# Altium PCB LKS_EVB_MVPOW_V4.0.PcbDoc (part 2 of 2)
Units mil, origin at the board's own origin, x right, y up, seen from the top; angles counter-clockwise.
Board outline 11300 x 7874.02 mil, 2 copper layers (Top Layer, Bottom Layer); 132 components, 86 nets, 363 pads, 334 vias.
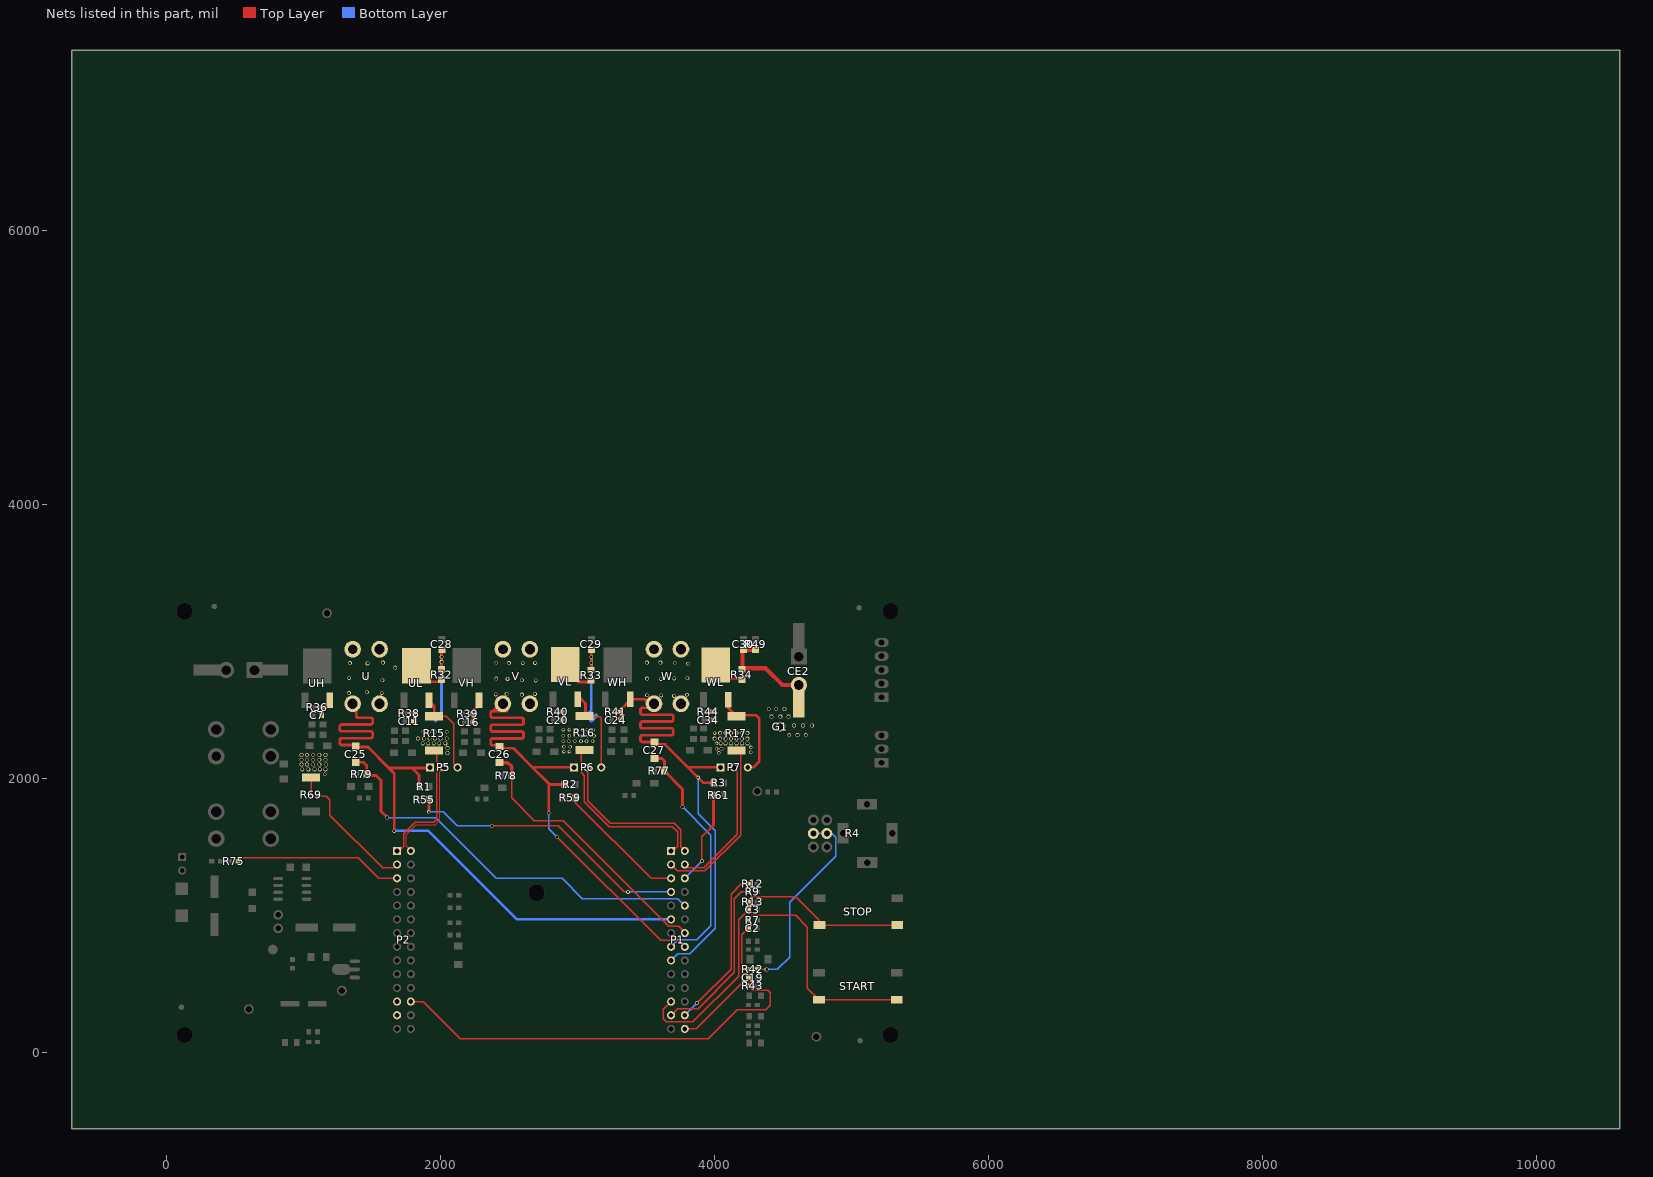
[diagram p2: the nets of this part, all layers, seen from the top]

## Via types
v1: diameter 26, hole 16, Top Layer to Bottom Layer, 92 vias
v2: diameter 28, hole 20, Top Layer to Bottom Layer, 77 vias
v3: diameter 27.99, hole 20, Top Layer to Bottom Layer, 73 vias
v4: diameter 28, hole 18, Top Layer to Bottom Layer, 52 vias
v5: diameter 26, hole 18, Top Layer to Bottom Layer, 40 vias

## Nets (pads, with @x,y where several pads share a name; then routed paths per layer and width w, separated by ;. In a path a pad name is that pad's centre, name@x,y a point inside that pad or via, vN(x,y) a via of type N, cw(c..) or ccw(c..) an arc to the next point about the centre after c; other vN are vias at no path point) (continued)
PGND: C28.1 C29.1 C30.1 CE2.2 G1.1 P1.1 P1.2 P2.1 P2.2 R15.2 R16.1 R17.2 R32.1 R33.1 R34.1 R49.2 R69.1 | length 6424.9
  Top Layer w10: R69.1@1054.41,2011.11 1054.41,1884.12 1063.52,1875 1165,1875 1192.23,1847.77 1192.23,1736.05 1577.35,1350.93 1661.45,1350.93 ; P2.1@1692.44,1471.01 1730.95,1509.52 1730.95,1600.95 1815,1685 1951.14,1685 1973.13,1706.99 1973.13,2186.86 R15.2@1952.5,2207.49 ; R16.1@3025,2185.72 3025,2050 3050,2025 3050,1834.72 3231.91,1652.81 3691.43,1652.81 3729.82,1614.43 3729.82,1508.37 3696.64,1475.19 P1.1@3682.39,1475.19 ; P1.2@3682.39,1375.19 3727.5,1330.08 3930.08,1330.08 4190,1590 4190,2176.64
  Top Layer w20: R32.1@2007.13,2802.08 C28.1@2007.13,2941.01 ; R33.1@3098.9,2793.46 C29.1@3098.9,2931.12
  Top Layer w30: C30.1@4203.69,2942.41 4203.69,2808.13 4372.16,2808.13 4494.17,2686.11 CE2.2@4615.51,2686.11 ; C30.1@4203.9,2942.2 R49.2@4303.03,2942.2
  Bottom Layer w20: 1962.9,2423.19 2007.13,2467.42 v4@2007.13,2889.83 ; 3067.14,2467.7 3098.95,2499.51 v5(3098.95,2893.01)
  Bottom Layer w30: 3099.84,2428.47 3133.42,2462.05
  other v1: 4030,2190 4265,2195 2900,2200 2940,2200 4015,2220 4265,2230 2900,2235 2945,2235 4015,2260 2895,2275 2935,2275 2980,2275 3025,2275 3065,2275 3110,2275 2895,2315 2940,2315 2990,2315 3035,2315 3075,2315 3120,2315 4000,2335 2895,2360 2940,2360 2995,2360 3035,2360 3070,2360 3115,2360
  other v3: 1155,2035 990,2070 1035,2070 1080,2070 1119.95,2070.18 1160,2070 985,2105 1025,2105 1070,2105 1115,2105 1165,2105 985,2140 1025,2140 1070,2140 1115,2140 1160,2140 985,2175 1025,2175 1070,2175 1115,2175 1160,2175 2050,2190 4050,2220 2050,2225 1870,2260 1910,2260 1950,2260 1990,2260 2035,2260 4045,2260 4080,2260 4120,2260 4160,2260 4200,2260 4240,2260 1835,2295 1880,2295 1920,2295 1960,2295 2000,2295 2045,2295 4545,2320 4605,2320 4665,2320 1875,2345 1915,2345 1955,2345 2000,2345 2045,2345 4580,2390 4645,2390 4710,2390 4415,2455 4480,2455 4540,2455 4395,2510 4450,2510 4510,2510
  other v4: 4000,2295 4040,2295 4080,2295 4120,2295 4160,2295 4200,2295 4240,2295 4040,2335 4080,2335 4120,2335 4160,2335 4200,2335 4240,2335 2007.13,2853.62 2007.13,2892.65
  other v5: 3098.96,2849.89
PU: P1.4 R55.1 | length 2100.3
  Top Layer w10: v2(2373.54,1656.85) 2859.88,1656.86 3341.17,1175.58 v4(3368.14,1175.58)
  Top Layer w20: v1(1915,1760) 1915,1847 R55.1@1918,1850
  Bottom Layer w10: v1(1915,1760) 2020.17,1760 2123.31,1656.85 v2(2373.54,1656.85) ; v4(3368.14,1175.58) P1.4@3682,1175.58
PV: P1.3 R59.1 | length 961
  Top Layer w10: R59.1@2984.51,1862 2984.51,1827.73 3537.04,1275.19 P1.3@3682.39,1275.19
PW: P1.17 R61.1 | length 694.2
  Top Layer w10: v2@3907.42,1400.22 3907.42,1577.42 3964.33,1634.33
  Top Layer w20: 3964.33,1634.33 3992.14,1662.14 R61.1@3992.14,1882.01
  Bottom Layer w10: P1.17@3782.39,1275.19 v2(3907.79,1400.58)
RXD0: P1.13 R9.1 | length 1252.7
  Top Layer w10: P1.13@3682.39,275.19 3731.72,324.52 3879.87,324.52 4145,589.65 4145,1126.55 4193.45,1175 R9.1@4247.85,1175
RXD1: P2.12
SPIN: C19.2 P2.26 R42.2 R43.2 | length 3227.8
  Top Layer w10: P2.26@1782.39,375.19 1872.44,375.19 2142.63,105 3955.26,105 4165.26,315 4372.15,315 4406.98,349.83 4406.98,440 4388.98,458 4280,458 R43.2@4248,490 C19.2@4248,550 R42.2@4248,610
START1: C2.2 P1.28 R7.2 START.2 START.4 | length 2649.6
  Top Layer w10: P1.28@3782.39,175.19 3865.19,175.19 4198.91,508.91 4198.91,863.91 4251.13,916.13 4251.13,980.13 4276,1005 4590.88,1005 4677.8,918.08 4677.8,474.05 START.2@4762.71,389.13 START.4@5327.66,389.13
STOP1: C3.1 P1.12 R13.1 STOP.2 STOP.4 | length 2626.4
  Top Layer w10: P1.12@3682.39,375.19 3624.64,317.44 3624.64,248.96 3647.58,226.02 3842.36,226.02 4177.08,560.75 4177.08,974.08 C3.1@4248,1045 4248,1118 4270,1140 4591.01,1140 4760,971.01 STOP.2@4760,940 ; STOP.2@4766.4,933.98 STOP.4@5333.33,933.98
TXD0: P1.27 R12.2 | length 1183.6
  Top Layer w10: v2(3871.48,364.27) 4120,612.78 4120,1160 4195,1235 4218.3,1235 R12.2@4247.85,1235
  Bottom Layer w10: P1.27@3782.39,275.19 v2(3871.48,364.27)
TXD1: P2.13
UI: C11.2 P5.3 R15.1 R38.1 UL.3 | length 661.8
  Top Layer w10: R15.1@1952.89,2457.26 2041.03,2457.26 2095.4,2402.89 2095.4,2109.42 P5.3@2124.05,2080.77
  Top Layer w20: UL.3@1907.37,2590.59 1907.37,2578.05 1952.89,2532.53 R15.1@1952.89,2446.69
UP-: P2.15 P5.2 | length 815.1
  Top Layer w8: P2.15@1782.39,1475.19 1750,1507.58 1750,1591.35 1823.65,1665 1960,1665 1995,1700 1995,2051.72 P5.2@2025.97,2082.69
UX: C7.2 C25.2 P1.6 P5.1 R1.2 R32.2 R36.1 U.1 UH.3 UL.2 | length 5074.2
  Top Layer w10: P1.6@3690.36,972.72 P1.6@3690.36,987.92
  Top Layer w20: C7.2@1132,2465 1133.5,2466.5 1133.5,2523.5 R36.1@1132,2525 ; R36.1@1144.12,2526.82 UH.3@1191.15,2573.85 ; U.1@1364.45,2508.84 1384.24,2489.06 1384.24,2462.5 ccw(c1399.24,2462.5) 1399.24,2447.5 1489.24,2447.5 cw(c1489.24,2432.5) 1504.24,2432.5 1504.24,2412.5 cw(c1489.24,2412.5) 1489.24,2397.5 1279.24,2397.5 ccw(c1279.24,2382.5) 1264.24,2382.5 1264.24,2362.5 ccw(c1279.24,2362.5) 1279.24,2347.5 1489.24,2347.5 cw(c1489.24,2332.5) 1504.24,2332.5 1504.24,2312.5 cw(c1489.24,2312.5) 1489.24,2297.5 1279.24,2297.5 ccw(c1279.24,2282.5) 1264.24,2282.5 1264.24,2262.5 ccw(c1279.24,2262.5) 1279.24,2247.5 1369.24,2247.5 cw(c1369.24,2232.5) C25.2@1384.23,2232.69 ; v2(1661.99,1621.11) 1661.98,2040.42 1621.64,2080.77 ; R1.2@1842,1945 1842,2028.77 1790,2080.77 ; UL.2@1850.76,2777.29 1850.76,2759.79 1900.34,2710.21 R32.2@1998.04,2710.21 ; P5.1@1924.05,2080.77 1790,2080.77 ; C25.2@1384.24,2232.5 ccw(c1369.24,2232.5) C25.2@1384.23,2232.69 ; C25.2@1384.24,2232.5 1384.24,2222.5 C25.2@1380.93,2239.36 1377.55,2232.69 C25.2@1384.23,2232.69 ; C25.2@1384.24,2232.5 1469.9,2232.5 1621.64,2080.77 ; 1621.64,2080.77 1790,2080.77
  Bottom Layer w20: v2@1661.86,1621.12 1910.73,1621.12 2556.66,975.19 P1.6@3682.39,975.19
  other v4: 1331.37,2627.07 1570.03,2628.61 1462.25,2633.23 1575.42,2721 1463.79,2734.08 1333.68,2737.93 1668.57,2812.61 1467.64,2843.41 1338.3,2845.71 1578.5,2849.56
VB1: C27.1 P1.8 R77.1 | length 1790.5
  Top Layer w20: C27.1@3560.39,2149.61 3615.39,2149.61 3635,2130 3635,2062 R77.1@3633,2060 3633,2057.41 3765.57,1924.84 v2(3765.57,1797.49)
  Bottom Layer w10: P1.8@3682.39,775.19 3732.68,825.49 3870.49,825.49 3973.66,928.66 3973.66,1589.38 v2@3758.73,1804.31
VB2: C26.1 P1.21 R78.1 | length 1996.4
  Top Layer w10: R78.1@2518,2025 2518,1861.52 2685,1694.52 2894.95,1694.52 3663.7,925.77 3738.69,925.77 P1.21@3780.13,884.34
  Top Layer w25: C26.1@2430.39,2119.61 2490.39,2119.61 2518,2092 R78.1@2518,2025
VB3: C25.1 P1.19 R79.1 | length 3006.6
  Top Layer w20: C25.1@1382.5,2119.68 C25.1@1380.93,2121.25 1438.75,2121.25 1461,2099 R79.1@1461,2035 1471,2025 1530,2025 1565,1990 1565,1764.44 v2(1611.31,1718.13)
  Bottom Layer w10: v2(1611.31,1718.13) 1963.42,1718.13 2406.55,1275 2887.19,1275 3035,1127.19 3730.39,1127.19 P1.19@3782.39,1075.19
VI: C20.2 P6.3 R16.2 R40.1 VL.3 | length 647.3
  Top Layer w10: R16.2@3068.99,2452.72 3162.2,2452.72 3172.56,2442.37 3172.56,2084.83 P6.3@3172.79,2084.61
  Top Layer w20: VL.3@2998.46,2592.01 3018.21,2592.01 3058.57,2551.65 R16.2@3058.57,2446.89
VOL_ADC: P2.3 R75.2 | length 1236.6
  Top Layer w10: R75.2@518.5,1399.16 544.34,1425 1400,1425 1549.81,1275.19 P2.3@1682.39,1275.19
VP-: P1.15 P6.2 | length 1175.7
  Top Layer w10: P6.2@3072.79,2084.61 3072.79,1842.21 3240,1675 3705,1675 3751.39,1628.61 3751.39,1506.19 P1.15@3782.39,1475.19
VS1: C24.2 C27.2 P1.9 P7.1 R3.2 R34.2 R41.1 W.1 WH.3 WL.2 | length 4339.2
  Top Layer w20: C24.2@3312,2425 3312,2485 3312,2504.54 WH.3@3384.43,2576.98 ; WH.3@3384.02,2581.28 3490.17,2581.28 W.1@3547.95,2523.5 ; C27.2@3567.19,2253.02 3637.85,2253.02 3806.27,2084.61 ; C27.2@3571.42,2269.54 3474.18,2269.54 cw(c3474.18,2284.54) 3459.18,2284.54 3459.18,2304.54 cw(c3474.18,2304.54) 3474.18,2319.54 3684.18,2319.54 ccw(c3684.18,2334.54) 3699.18,2334.54 3699.18,2354.54 ccw(c3684.18,2354.54) 3684.18,2369.54 3474.18,2369.54 cw(c3474.18,2384.54) 3459.18,2384.54 3459.18,2404.54 cw(c3474.18,2404.54) 3474.18,2419.54 3684.18,2419.54 ccw(c3684.18,2434.54) 3699.18,2434.54 3699.18,2454.54 ccw(c3684.18,2454.54) 3684.18,2469.54 3474.18,2469.54 cw(c3474.18,2484.54) 3459.18,2484.54 3459.18,2504.54 cw(c3474.18,2504.54) 3474.18,2519.54 3547.95,2519.54 3570.72,2519.54 ccw(c3570.72,2528.01) W.1@3579.18,2528.01 ; R3.2@3992.14,1972.01 3918.87,1972.01 v1(3880,2010.87) 3806.27,2084.61 ; WL.2@4009.18,2830.64 4107.96,2731.86 R34.2@4204.79,2731.86 ; P7.1@4042.39,2084.61 3806.27,2084.61
  Bottom Layer w10: P1.9@3682.39,675.19 3729.67,722.48 3817.48,722.48 4005.15,910.15 4005.15,1620.8 3880,1745.94 v1(3880,2010.87)
  other v4: 3704.5,2606.18 3611.3,2609.64 3507.75,2611.36 3798.8,2615.18 3607.85,2730.44 3507.75,2732.17 3706.23,2733.9 3801.15,2735.62 3806.32,2840.9 3709.68,2847.8 3506.03,2849.53 3604.4,2849.53
VS2: C16.2 C26.2 P1.22 P6.1 R2.2 R33.2 R39.1 V.1 VH.3 VL.2 | length 4362.5
  Top Layer w10: v2(2851.66,1575.73) 3605.42,821.97 3735.61,821.97 P1.22@3782.39,775.19
  Top Layer w20: R39.1@2232,2475 2236,2471 2236,2416 C16.2@2237,2415 ; R39.1@2235,2475 2241,2481 2241,2499 2266.15,2524.15 2266.15,2561.24 VH.3@2280.75,2575.85 ; 2396.86,2515.18 2416.11,2495.93 ; C26.2@2432.41,2230.24 2416.72,2245.93 2381.1,2245.93 cw(c2381.1,2260.93) 2366.1,2260.93 2366.1,2280.93 cw(c2381.1,2280.93) 2381.1,2295.93 2591.1,2295.93 ccw(c2591.1,2310.93) 2606.1,2310.93 2606.1,2330.93 ccw(c2591.1,2330.93) 2591.1,2345.93 2381.1,2345.93 cw(c2381.1,2360.93) 2366.1,2360.93 2366.1,2380.93 cw(c2381.1,2380.93) 2381.1,2395.93 2591.1,2395.93 ccw(c2591.1,2410.93) 2606.1,2410.93 2606.1,2430.93 ccw(c2591.1,2430.93) 2591.1,2445.93 2381.1,2445.93 cw(c2381.1,2460.93) 2366.1,2460.93 2366.1,2480.93 cw(c2381.1,2480.93) 2381.1,2495.93 2416.11,2495.93 ; C26.2@2447.1,2224.46 2530.9,2224.46 2670.75,2084.61 ; V.1@2486.1,2502.19 cw(c2479.84,2502.19) 2479.84,2495.93 2416.11,2495.93 ; v1(2790,1750) 2790,1965.36 ; R2.2@2907,1960 2795.36,1960 2790,1965.36 ; VL.2@2958.19,2755.46 3005.84,2707.81 R33.2@3098.92,2707.81 ; P6.1@2972.79,2084.61 2670.75,2084.61 ; 2670.75,2084.61 2790,1965.36
  Top Layer w30: VL.2@2911.27,2835.1 VL.2@2983.4,2907.22
  Bottom Layer w10: v1(2790,1750) 2790,1637.39 v2(2851.66,1575.73)
  other v4: 2593.18,2616.27 2402.91,2617.09 2688.5,2620.52 2481.98,2622.03 2694.49,2719.23 2594,2720.88 2488.57,2730.76 2406.2,2732.41 2499.28,2846.08 2599.77,2846.9 2690.37,2846.9 2406.2,2848.55
WI: C34.2 P7.3 R17.1 R44.1 WL.3 | length 722.6
  Top Layer w20: WL.3@4099.73,2578.67 4099.73,2517.38 R17.1@4159.03,2458.08 ; R17.1@4175.14,2465.89 4301.92,2465.89 4325.99,2441.82 4325.99,2125.99 4284.61,2084.61 P7.3@4242.39,2084.61
WP-: P1.16 P7.2 | length 992
  Top Layer w10: P1.16@3782.39,1375.19 3806.53,1351.05 3920,1351.05 4165,1596.05 4165,2061.99 P7.2@4142.39,2084.61
ZB: R4.3 R4.5 R42.1 | length 1508
  Top Layer w10: R42.1@4312,610 v3(4380,610)
  Bottom Layer w10: v3(4380,610) 4458.36,610 4547.36,699 4547.36,1100.05 4883.06,1435.75 4883.06,1572.91 R4.5@4853.83,1602.13 ; R4.3@4720.74,1602.13 R4.5@4819.17,1602.13 R4.5@4853.83,1602.13 ; R4.5@4819.62,1636.35 R4.5@4853.83,1602.13
pads on no net: R4.0 U4.3 U4.6

## Polygon pours and split planes (outlines as drawn)
PGND on Top Layer "PGND_L01_P082" (solid, pour order 82): 3980,2375 4290,2375 4305,2360 4305,2160 4295,2150 3990,2150 3980,2160
PGND on Top Layer "PGND_L01_P081" (solid, pour order 81): 2870,2380 2870,2150 2880,2140 3135,2140 3155,2160 3155,2380
PGND on Top Layer "PGND_L01_P080" (solid, pour order 80): 1810,2370 2080,2370 2080,2155 2065,2140 1820,2140 1810,2150
GND on Top Layer "Bottom Layer-No Net" (solid, remove dead copper, pour order 79): 215,995 650,995 650,519.65 778.65,519.65 894,635 899,630 1090,630 1090,315 960,185 840,65 510,65 495,65 215,345
PGND on Top Layer "Bottom Layer-No Net" (solid, remove dead copper, pour order 71): 971.78,2204.3 971.78,1940.64 972.27,1940 1188.86,1940 1195,1947.94 1195,2146.52 1195,2164.13 1163.42,2205
+5V on Top Layer "Bottom Layer-No Net" (solid, remove dead copper, pour order 78): 1080,505 1325,505 1325,225 1324.07,226.14 1080,226.14
WI on Top Layer "Top Layer-No Net" (solid, remove dead copper, pour order 59): 3980.28,2597.41 4021.94,2639.07 4243.08,2639.07 4266.24,2639.07 4273.96,2631.35 4281.68,2623.63 4281.68,2504.41 4281.68,2406.68 3979.48,2406.4
VI on Top Layer "Top Layer-No Net" (solid, remove dead copper, pour order 61): 2920.55,2638.24 2923.79,2641.48 3100.63,2641.48 3126.02,2641.48 3130.7,2636.79 3140.47,2627.03 3140.47,2469.61 3140.47,2405 2870,2405 2870,2599.02 2909.22,2638.24
UI on Top Layer "Top Layer-No Net" (solid, remove dead copper, pour order 62): 1827.2,2629.4 1795,2597.2 1795,2400 2040.75,2400 2040.75,2516.3 2040.75,2623.29 2032.89,2631.15
VS1 on Top Layer "Bottom Layer-No Net" (solid, remove dead copper, pour order 72): 3491.16,3026.45 3459.58,2994.88 3459.58,2969.05 3459.58,2687.07 3424.43,2651.91 3392.14,2619.63 3392.14,2588.06 3392.14,2544.29 3397.88,2538.55 3438.06,2498.37 3719.32,2498.37 3809.72,2498.37 3828.38,2517.03 3834.12,2522.77 3834.12,2605.28 3834.12,2647.61 3847.74,2661.23 3857.79,2671.28 3934.56,2671.28 3983.35,2671.28 4012.77,2700.7 4018.51,2706.44 4018.51,2908.78 4018.51,2968.33 4010.62,2976.22 3993.4,2993.44 3819.77,2993.44 3787.48,2993.44 3753.76,3027.16
VS2 on Top Layer "Bottom Layer-No Net" (solid, remove dead copper, pour order 73): 2388.34,3013.8 2356.77,2982.22 2356.77,2956.4 2356.77,2674.42 2321.61,2639.26 2289.32,2606.98 2289.32,2575.41 2289.32,2531.64 2295.06,2525.9 2335.24,2485.72 2616.5,2485.72 2706.9,2485.72 2725.56,2504.37 2731.3,2510.11 2731.3,2592.63 2731.3,2634.96 2744.92,2648.58 2754.97,2658.63 2831.74,2658.63 2880.53,2658.63 2909.96,2688.05 2915.7,2693.79 2915.7,2896.13 2915.7,2955.68 2907.8,2963.57 2890.58,2980.79 2716.95,2980.79 2684.66,2980.79 2650.94,3014.51
UX on Top Layer "Bottom Layer-No Net" (solid, remove dead copper, pour order 74): 1300.75,3012.37 1269.18,2980.8 1269.18,2954.97 1269.18,2673 1234.02,2637.84 1201.73,2605.55 1201.73,2573.98 1201.73,2530.22 1207.47,2524.48 1247.65,2484.3 1528.91,2484.3 1619.31,2484.3 1637.97,2502.95 1643.71,2508.69 1643.71,2591.2 1643.71,2633.54 1657.33,2647.16 1667.38,2657.2 1744.15,2657.2 1792.94,2657.2 1822.37,2686.63 1828.11,2692.37 1828.11,2894.7 1828.11,2954.26 1820.21,2962.15 1802.99,2979.37 1629.36,2979.37 1597.07,2979.37 1563.35,3013.09
GND on Top Layer "Bottom Layer-No Net" (solid, remove dead copper, pour order 75): 1056.69,1742.69 1060.98,1742.69 1114.17,1670.14 1122.75,1658.44 1122.75,1561.33 1122.75,1553.14 1108.16,1533.25 1107.31,1534.42 740.16,1534.42 50.46,1534.42 -42.18,1660.78 22.17,1748.55 22.17,1913.53 22.17,1984.9 31.6,1997.77 39.31,2008.29 790.77,2008.29 823.38,2008.29 840.53,1984.9 865.4,1950.98 865.4,1771.94 865.4,1745.03 864.54,1743.86
GND on Top Layer "Bottom Layer-No Net" (solid, remove dead copper, pour order 69): 275.39,1983.9 225.38,2033.91 225.38,2175.26 225.38,2640.63 298.22,2713.47 450.45,2865.71 450.45,2959.22 450.45,3001.62 415.66,3036.41 401.52,3050.55 221.03,3050.55 126.43,3050.55 51.41,2975.53 18.79,2942.91 18.79,1982.81
+48V on Top Layer "Bottom Layer-No Net" (solid, remove dead copper, pour order 67): 653.01,3316.24 645.27,3316.24 614.27,3285.24 612.72,3283.69 612.72,2948.92 612.72,2807.88 535.22,2730.38 295.74,2490.89 295.74,2411.36 295.74,2157.73 313.59,2139.88 318.24,2135.23 653.01,2135.23 851.4,2135.23 871.55,2155.38 896.35,2180.18 896.35,2218.92 896.35,2673.04 941.29,2717.98 944.4,2714.88 1042.03,2714.88 1161.37,2714.88 1197.03,2750.54 1204.77,2758.28 1204.77,2959.77 1204.77,3035.71 1252.82,3083.76 1511.65,3083.76 1958.01,3083.76 1996.76,3045.01 2102.15,2939.62 2102.15,2869.87 2271.09,2869.87 2274.19,2872.97 2288.14,2886.92 2288.14,2978.36 2288.14,3004.71 2317.59,3034.16 2367.18,3083.76 2517.52,3083.76 3072.38,3083.76 3115.77,3040.36 3194.82,2961.32 3194.82,2891.57 3202.57,2891.57 3225.81,2868.32 3228.91,2865.22 3363.75,2865.22 3380.8,2865.22 3388.55,2872.97 3388.55,2952.02 3388.55,3031.06 3428.85,3071.36 3433.5,3076.01 4079.8,3076.01 4140.24,3076.01 4185.19,3031.06 4186.74,3032.61 4360.33,3032.61 4388.22,3032.61 4413.02,3007.81 4464.17,2956.67 4464.17,2928.77 4464.17,2893.12 4479.67,2877.62 4484.31,2872.98 4783.45,2872.98 4805.15,2872.98 4831.49,2899.32 4831.48,2899.33 4831.48,3268.18 4831.48,3300.75 4750.9,3381.33
PGND on Top Layer "Bottom Layer-No Net" (solid, remove dead copper, pour order 63): 4373.22,2728.34 4719.2,2728.34 4747.71,2699.83 4758.5,2689.04 4758.5,2397 4758.5,2394.69 4588.98,2225.16 4407.12,2225.16 4370.14,2225.16 4370.14,2225.17
GND on Top Layer "Bottom Layer-No Net" (solid, remove dead copper, pour order 49): 851.65,1833.75 854.38,1836.48 1135.34,1836.48 1139.42,1836.48 1147.62,1828.28 1153.55,1822.35 1153.55,1688.95 1153.55,1554.62 1132.16,1533.23 1131.7,1532.76 1106.2,1532.76 881.7,1532.76 855.74,1558.73
GND on Top Layer "Bottom Layer-No Net" (solid, remove dead copper, pour order 50): 805.77,2008.29 805.89,2008.18 871.14,2008.18 895.54,2008.18 901.99,2001.73 920.27,1983.45 920.27,1908.48 920.27,1901.67 974.43,1847.51 1005.63,1816.31 1005.63,1721.63 937.13,1721.63 772.16,1886.6
+15V on Top Layer "Bottom Layer-No Net" (solid, remove dead copper, pour order 53): 675,950 1085,950 1085,754.25 1080,749.42 1080,660 680,660 675,664.83
GND on Top Layer "Bottom Layer-No Net" (solid, remove dead copper, pour order 58): 1090,630 630,630 630,485 640,475 650,465 965,465 965,590 975,600
NetCE3_1 on Top Layer "Bottom Layer-No Net" (solid, remove dead copper, pour order 46): 195,1050 415,1050 445,1050 460,1065 470,1075 470,1205 470,1225 480,1235 505,1260 730,1260 730,1290 695,1325 675,1345 455,1345 355,1345 305,1295 190,1295
NetR37_2 on Top Layer "Bottom Layer-No Net" (solid, remove dead copper, pour order 48): 525,1225 510,1210 510,1195 510,1140 520,1130 535,1115 665,1115 690,1115 730,1155 730,1185 710,1185 670,1225
GND on Top Layer "Bottom Layer-No Net" (solid, remove dead copper, pour order 52): 985,1130 985,1060 985,1035 990,1030 1000,1020 1090,1020 1170,1020 1180,1010 1210,980 1210,910 1210,795 1220,785 1375,785 1375,1090 1335,1130
NetC4_2 on Top Layer "Bottom Layer-No Net" (solid, remove dead copper, pour order 57): 555,1085 860,1085 860,985 850,975 640,975 595,975 570,1000 555,1015 555,1035
GND on Bottom Layer "Bottom Layer-No Net" (solid, remove dead copper, pour order 77): 313.62,633.42 291.92,611.73 291.92,342.04 291.92,338.94 422.11,208.75 654.6,-23.74 2378.07,-23.74 4737.02,-23.74 5313.59,552.83 5335.28,574.53 5335.28,1820.65 5335.28,1902.31 5316.69,1920.91 5308.67,1928.93 4200.04,1928.93 4047.63,1928.93 4018.75,1900.05 4012.34,1893.64 4012.34,1733.2 4012.34,1691.49 3981.85,1661 3895.21,1574.36 2422.39,1574.36 2059.8,1574.36 2005.25,1519.81 1921.83,1436.39 1921.83,1190.92 1921.83,699.47 1856.77,634.4
GND on Bottom Layer "Top Layer-No Net" (solid, remove dead copper, pour order 65): 1116.26,1827.77 1116.26,1894.82 1172.55,1986.64 1213.65,2053.68 1326.24,2053.68 3271.43,2053.68 3316.1,1980.81 3316.1,1740.55 1261.15,1740.55 1196.68,1635.39
PGND on Bottom Layer "Top Layer-No Net" (solid, remove dead copper, pour order 76): 1007.65,1976.98 969.71,2014.92 969.71,2103.9 969.71,2423.65 990.22,2444.16 996.08,2450.02 1144.12,2450.02 1162.65,2450.02 1199.76,2412.92 1207.63,2405.05 1589.8,2405.05 1633.42,2405.05 1727.69,2499.32 1731.98,2503.6 2230.92,2503.6 2231.13,2503.6 2322.28,2412.46 2322.36,2412.37 2586.43,2412.37 2739.21,2412.37 2816.69,2489.85 2835.51,2508.67 3283.7,2508.67 3314.12,2508.67 3383.63,2439.16 3396.65,2426.13 3841.23,2426.13 3846.3,2426.13 3920.88,2500.71 3924.5,2504.33 4236.57,2504.33 4248.88,2504.33 4313.32,2568.77 4358.21,2613.66 4358.21,2691.86 4358.21,2717.93 4368.35,2728.06 4374.14,2733.85 4506.64,2733.85 4754.12,2733.85 4772.22,2715.75 4775.27,2712.7 4775.27,2313.9 4775.27,2208.19 4760.79,2193.71 4746.16,2179.08 4207.37,2179.08 1274.81,2179.08 1233.66,2137.93 1159.31,2063.58 1159.31,1992.53 1159.31,1990.77 1145.52,1976.98
GND on Bottom Layer "Bottom Layer-No Net" (solid, remove dead copper, pour order 68): 277.01,1984.71 226.99,2034.72 226.99,2176.08 226.99,2641.45 299.83,2714.29 452.06,2866.52 452.06,2960.03 452.06,3002.43 417.27,3037.23 403.14,3051.36 222.64,3051.36 128.05,3051.36 53.02,2976.34 20.4,2943.72 20.4,1983.62
GND on Bottom Layer "Bottom Layer-No Net" (solid, remove dead copper, pour order 70): 23.02,2043.25 23.02,1787.19 51.07,1760.87 354.52,1476.1 1216.43,1476.1 1220.26,1476.1 1234.28,1489.26 1233.01,1490.46 1233.01,1610.11 1233.01,1783.6 1255.96,1805.14 1167.98,1887.7 949.96,1887.7 921.91,1887.7 836.48,1967.87 786.75,2014.53 749.78,2014.53
+48V on Bottom Layer "Bottom Layer-No Net" (solid, remove dead copper, pour order 66): 650.43,3314.49 642.69,3314.49 611.69,3283.5 610.14,3281.95 610.14,2947.17 610.14,2806.13 532.64,2728.64 293.16,2489.15 293.16,2409.62 293.16,2155.99 311.01,2138.14 315.66,2133.49 650.43,2133.49 848.82,2133.49 868.97,2153.63 893.77,2178.43 893.77,2217.18 893.77,2671.29 938.71,2716.24 941.82,2713.13 1039.45,2713.13 1158.79,2713.13 1194.45,2748.8 1202.19,2756.54 1202.19,2958.02 1202.19,3033.97 1250.24,3082.01 1509.07,3082.01 1955.43,3082.01 1994.18,3043.26 2099.57,2937.87 2099.57,2868.13 2268.51,2868.13 2271.61,2871.23 2285.56,2885.18 2285.56,2976.62 2285.56,3002.97 2315.01,3032.42 2364.6,3082.01 2514.94,3082.01 3069.8,3082.01 3113.19,3038.62 3192.24,2959.57 3192.24,2889.83 3199.99,2889.83 3223.23,2866.58 3226.33,2863.48 3361.17,2863.48 3378.22,2863.48 3385.97,2871.23 3385.97,2950.27 3385.97,3029.32 3426.27,3069.61 3430.92,3074.26 4077.22,3074.26 4137.66,3074.26 4182.61,3029.32 4184.16,3030.87 4357.75,3030.87 4385.64,3030.87 4410.44,3006.07 4461.59,2954.92 4461.59,2927.02 4461.59,2891.38 4477.09,2875.88 4481.73,2871.24 4780.87,2871.24 4802.57,2871.24 4828.91,2897.58 4828.9,2897.58 4828.9,3266.44 4828.9,3299 4748.32,3379.59
+15V on Bottom Layer "Bottom Layer-No Net" (solid, remove dead copper, pour order 56): 1295.74,1360 1412.72,1360 1429.05,1385.64 1440.8,1404.1 1440.8,1641.3 1440.8,1719.61 1437.07,1725.48 1432.19,1733.13 1337.31,1733.13 1302.34,1733.13 1280.81,1699.34 1276.8,1693.04 1276.8,1360
UX on Bottom Layer "Bottom Layer-No Net" (solid, remove dead copper, pour order 47): 1300.75,3012.37 1269.18,2980.8 1269.18,2979.37 1269.18,2673 1201.73,2605.55 1201.73,2530.22 1247.65,2484.3 1619.31,2484.3 1637.97,2502.95 1643.71,2508.69 1643.71,2633.54 1667.38,2657.2 1792.94,2657.2 1965.34,2657.2 1970.14,2662.01 1970.14,2672.01 1970.14,3002.01 1960.14,3012.01
VS2 on Bottom Layer "Bottom Layer-No Net" (solid, remove dead copper, pour order 45): 2390.75,3012.37 2359.18,2980.8 2359.18,2979.37 2359.18,2673 2291.73,2605.55 2291.73,2530.22 2337.65,2484.3 2709.31,2484.3 2727.97,2502.95 2733.71,2508.69 2733.71,2633.54 2757.38,2657.2 2882.94,2657.2 3055.34,2657.2 3060.14,2662.01 3060.14,2672.01 3060.14,3002.01 3050.14,3012.01
VS1 on Bottom Layer "Bottom Layer-No Net" (solid, remove dead copper, pour order 44): 3490.75,3012.37 3459.18,2980.8 3459.18,2979.37 3459.18,2673 3391.73,2605.55 3391.73,2530.22 3437.65,2484.3 3809.31,2484.3 3827.97,2502.95 3833.71,2508.69 3833.71,2633.54 3857.38,2657.2 3982.94,2657.2 4155.34,2657.2 4160.14,2662.01 4160.14,2672.01 4160.14,3002.01 4150.14,3012.01
PGND on Bottom Layer "Bottom Layer-No Net" (solid, remove dead copper, pour order 51): 1146.83,1978.38 1360.14,2191.69 1360.14,2279.12 1197.26,2279.12 1090.14,2172.01
GND on Bottom Layer "Bottom Layer-No Net" (solid, remove dead copper, pour order 54): 770,610 1000,840 1000,1100 1335,1100 1350,1085 1375,1060 1375,720 1375,695 1465,605
PGND on Bottom Solder "Top Layer-No Net" (solid): 1018.44,2406.75 996.2,2384.52 996.2,2291.93 996.2,2048.62 1021.28,2023.55 1034.15,2010.67 1120.9,2010.67 1152.76,2010.67 1174.44,2032.36 1199.63,2057.54 1199.63,2103.9 1199.63,2163.27 1236.12,2199.76 1240.3,2203.94 2292.4,2203.94 4693.2,2203.94 4732.37,2243.11 4735.34,2246.09 4735.34,2545.85 4735.34,2686.43 4727.16,2694.61 4721.21,2700.56 4481.7,2700.56 4434.84,2700.56 4414.02,2679.73 4394.68,2660.39 4394.68,2621.72 4394.68,2598.66 4350.79,2554.77 4286.82,2490.8 4209.47,2490.8 4208.58,2490.8 4124.17,2406.4
+48V on Bottom Solder "Bottom Layer-No Net" (solid): 4531.66,2989.31 4569.12,2951.85 4569.12,2909.18 4790.05,2909.18 4805.03,2924.16 4826.75,2945.88 4826.75,3032.76
VS1 on Bottom Solder "Top Layer-No Net" (solid): 3493.6,3004.22 3481.12,2991.74 3481.12,2964.29 3481.12,2678.56 3433.7,2631.14 3427.46,2624.9 3427.46,2550.04 3427.46,2532.57 3447.43,2512.61 3448.68,2511.36 3743.15,2511.36 3776.84,2511.36 3791.81,2526.33 3800.54,2535.07 3800.54,2634.89 3800.54,2663.59 3823,2686.04 3859.19,2722.23 4067.56,2722.23 4085.03,2722.23 4097.51,2734.71 4097.51,2858.23 4097.51,2924.37 4081.29,2940.59 4068.81,2953.06 3952.77,2953.06 3785.57,2953.06 3733.16,3005.47
VS2 on Bottom Solder "Top Layer-No Net" (solid): 2393.58,2999.83 2381.1,2987.35 2381.1,2959.9 2381.1,2674.16 2333.69,2626.75 2327.45,2620.51 2327.45,2545.64 2327.45,2528.18 2347.41,2508.21 2348.66,2506.96 2643.13,2506.96 2676.82,2506.96 2691.79,2521.94 2700.53,2530.67 2700.53,2630.49 2700.53,2659.19 2722.98,2681.65 2759.17,2717.83 2967.54,2717.83 2985.01,2717.83 2997.49,2730.31 2997.49,2853.84 2997.49,2919.97 2981.27,2936.19 2968.79,2948.67 2852.75,2948.67 2685.55,2948.67 2633.15,3001.08
UX on Bottom Solder "Top Layer-No Net" (solid): 1315.84,2991.56 1303.37,2979.08 1303.37,2951.63 1303.37,2665.9 1255.95,2618.48 1249.71,2612.24 1249.71,2537.38 1249.71,2519.91 1269.68,2499.95 1270.93,2498.7 1565.4,2498.7 1599.08,2498.7 1614.06,2513.67 1622.79,2522.41 1622.79,2622.23 1622.79,2650.92 1645.25,2673.38 1681.44,2709.57 1889.81,2709.57 1907.28,2709.57 1919.76,2722.05 1919.76,2845.57 1919.76,2911.7 1903.54,2927.93 1891.06,2940.4 1775.02,2940.4 1607.82,2940.4 1555.41,2992.81
+48V on Bottom Solder "Top Layer-No Net" (solid): 688.25,3279.3 688.25,2905.73 688.25,2867.97 445.83,2625.55 404.1,2583.82 404.1,2373.19 404.1,2172.49 416.02,2160.57 726.01,2160.57 799.53,2160.57 823.37,2184.42 837.28,2198.33 837.28,2460.62 837.28,2643.43 912.79,2718.94 940.61,2746.76 1077.72,2746.76 1107.53,2746.76 1151.24,2790.48 1171.11,2810.35 1171.11,2985.21 1171.11,3028.93 1220.79,3078.6 1244.64,3102.45 2063.31,3102.45 4668.37,3102.45 4684.27,3118.34 4708.12,3142.19 4708.12,3267.38 4708.12,3291.22 4688.24,3311.09 4686.26,3313.08 3323.12,3313.08 702.03,3313.08 688.16,3299.21
+48V on Bottom Solder "Bottom Layer-No Net" (solid): 4371.6,3119.75 4411.79,3119.75 4485.92,3036.58 4541.35,2974.4 4781.78,2974.4 4803.95,2974.4 4827.51,3000.84 4835.13,3009.38 4835.13,3202.13 4835.13,3270.53 4812.26,3296.18 4797.2,3313.08 4652.1,3313.08

## Keep-outs
Keep-Out Layer:
  lines w5: 0,90 ccw(c89.64,90) 89.64,0.36 5330.41,0.36 ccw(c5330.41,84.52) 5414.57,84.52 5414.57,3267.95 ccw(c5327.96,3267.95) 5327.96,3354.57 86.61,3354.57 ccw(c86.61,3267.95) 0,3267.95 0,90
  lines w9.97: 7070.71,-191.55 10559.69,-191.55 ; 7070.71,108.34 10559.69,108.34 ; 7070.71,408.23 10559.69,408.23 ; 7569.13,-491.44 7569.13,-191.55 7569.13,108.34 7569.13,408.23 7569.13,708.12 ; 8266.93,-491.44 8266.93,-191.55 8266.93,108.34 8266.93,408.23 8266.93,708.12 ; 8865.04,-191.55 8865.04,108.34 8865.04,408.23 8865.04,708.12 ; 9313.15,-496.44 9313.15,-196.55 ; 9313.15,-196.44 9313.15,103.45
  lines w10: -690.69,7320.3 -690.69,-553.71 10608.52,-553.71 ; -690.69,7321.29 10608.52,7321.29 ; -685.69,446.29 -640.69,446.29 ; -685.69,1446.29 -640.69,1446.29 ; -685.69,2446.29 -640.69,2446.29 ; -685.69,3446.29 -640.69,3446.29 ; -685.69,4446.29 -640.69,4446.29 ; -685.69,5446.29 -640.69,5446.29 ; -685.69,6446.29 -640.69,6446.29 ; 309.31,-553.71 309.31,-503.71 ; 309.31,7271.29 309.31,7321.29 ; 1309.31,-553.71 1309.31,-503.71 ; 1309.31,7271.29 1309.31,7321.29 ; 2309.31,-553.71 2309.31,-503.71 ; 2309.31,7271.29 2309.31,7321.29 ; 3309.31,-553.71 3309.31,-503.71 ; 3309.31,7271.29 3309.31,7321.29 ; 4309.31,-553.71 4309.31,-503.71 ; 4309.31,7271.29 4309.31,7321.29 ; 5309.31,-553.71 5309.31,-503.71 ; 5309.31,7271.29 5309.31,7321.29 ; 6309.31,-553.71 6309.31,-503.71 ; 6309.31,7271.29 6309.31,7321.29 ; 7309.31,-553.71 7309.31,-503.71 ; 7309.31,7271.29 7309.31,7321.29 ; 8309.31,-553.71 8309.31,-503.71 ; 8309.31,7271.29 8309.31,7321.29 ; 9309.31,-553.71 9309.31,-503.71 ; 9309.31,7271.29 9309.31,7321.29 ; 10309.31,-553.71 10309.31,-503.71 ; 10309.31,7271.29 10309.31,7321.29 ; 10564.31,446.29 10609.31,446.29 ; 10564.31,1446.29 10609.31,1446.29 ; 10564.31,2446.29 10609.31,2446.29 ; 10564.31,3446.29 10609.31,3446.29 ; 10564.31,4446.29 10609.31,4446.29 ; 10564.31,5446.29 10609.31,5446.29 ; 10564.31,6446.29 10609.31,6446.29 ; 10609.31,-553.71 10609.31,7320.3 ; -640.69,-503.71 -640.69,7271.29 10559.31,7271.29 10559.31,-503.71 -640.69,-503.71
  lines w29.91: 7070.71,-491.44 10559.69,-491.44 10559.69,708.12 7070.71,708.12 7070.71,-491.44
  text "Design" at 7159.31,526.29 h60
  text "LiuHZ" at 7779.31,526.29 h60
  text "File Name" at 8314.31,526.29 h60
  text "LKS_EVB_MVPOW_V5.0" at 8965,510 h60
  text "LKS Mid. Volt. Demo" at 8964.31,281.29 h60
  text "Check" at 7189.31,226.29 h60
  text "Project" at 8394.31,226.29 h60
  text "Power Base Plate" at 8964.31,171.29 h60
  text "Version" at 8389.31,-73.71 h60
  text "V5.0" at 8999.31,-78.71 h60
  text "2022/04/22" at 9484.31,-83.71 h60
  text "Walt" at 7799.31,-88.71 h60
  text "Standard" at 7099.31,-93.71 h60
  text "Page   of" at 8449.31,-353.71 h60
  text "Approve" at 7114.31,-368.71 h60
  text "Linko Semiconductor" at 9384.31,-378.71 h60
Mechanical 1:
  lines w5: 0,90 0,3267.95 cw(c86.61,3267.95) 86.61,3354.57 5327.96,3354.57 cw(c5327.96,3267.95) 5414.57,3267.95 5414.57,84.52 cw(c5330.41,84.52) 5330.41,0.36 89.64,0.36

## Silkscreen, mask and mechanical layers (free items; w line width, h text height)
Top Overlay:
  drawing of 483 lines, arcs and shapes, not listed
  text "删掉R40电阻，原用于母线电压分压，多余了" at 408.38,3643.63 h80
  text "20210122" at 7.8,3641.99 h80
  text "5414.571 (mil)" at 2330.14,3402.01 h60
  text "LKS _EVB_MVPOW_V4.0_20210906" at 3329.44,3202.58 h40
  text "VCC" at 1231.7,3198.82 h40
  text "HALL" at 5073.27,3113.95 h40
  text "V" at 2515,3085 h100
  text "W" at 3604.48,3084.71 h100
  text "U" at 1420,3070 h100
  text "5VH" at 4899.65,2977.58 h40
  text "HU" at 4899.65,2875 h40
  text "HV" at 4899.65,2777.64 h40
  text "HW" at 4899.65,2674.61 h40
  text "GND" at 4899.65,2573.94 h40
  text "RX0" at 4915.44,2304.25 h40
  text "PGND" at 4410.57,2270.41 h30
  text "TX0" at 4909.79,2191.35 h40
  text "VCC" at 169.32,2147.72 h80 r90
  text "GND" at 4909.79,2099.14 h40
  text "3354.564 (mil)" at -144.06,2050.52 h60 r270.08
  text "GND" at 4260.81,1982.01 h40
  text "R4" at 4873.84,1848.91 h40
  text "跳帽连接右端是三电阻采样" at 2187.42,1720.4 h100
  text "跳帽连接左端是三相MOS内阻采样" at 2186.61,1634.33 h100
  text "GND" at 175,1610 h80 r90
  text "POWER" at 30,1500 h40
  text "STOP" at 4815,1285 h40
  text "15V" at 585,740 h40
  text "START" at 4820,740 h40
  text "5V" at 1542.45,652.09 h40
  text "5V" at 1544.25,558.29 h40
  text "5V" at 1860.51,552.88 h40
  text "5V" at 1255,330 h40
  text "GND" at 545,185 h40
  text "GND" at 4815,95 h40
Bottom Overlay:
  drawing of 452 lines, arcs and shapes, not listed
Top Solder:
  circle w78.74: c5061.78,91.86 r17.13
  circle w78.74: c5053.86,3250.94 r17.13
  circle w78.74: c107.29,335.97 r17.13
  circle w78.74: c347.29,3260.97 r17.13
Mechanical 1:
  lines w5: 0,90 ccw(c89.64,90) 89.64,0.36

## Text inside footprints (layer, text, board x,y; h text height)
1: Top Overlay "LINKO SEMICONDUCTOR" at 3960.47,1285.78 h78.74
P1: Top Overlay "28" at 3757.62,115.19 h30 r270; Top Overlay "14" at 3657.62,115.19 h30 r270; Top Overlay "15" at 3757.62,1615.19 h30 r270; Top Overlay "1" at 3652.62,1570.19 h30 r270
P2: Top Overlay "1" at 1652.62,1570.19 h30 r270; Top Overlay "15" at 1757.62,1615.19 h30 r270; Top Overlay "14" at 1657.62,115.19 h30 r270; Top Overlay "28" at 1757.62,115.19 h30 r270